# EAGLE board BoostConverter(using ATmega328P) (EAGLE 9.6.0)
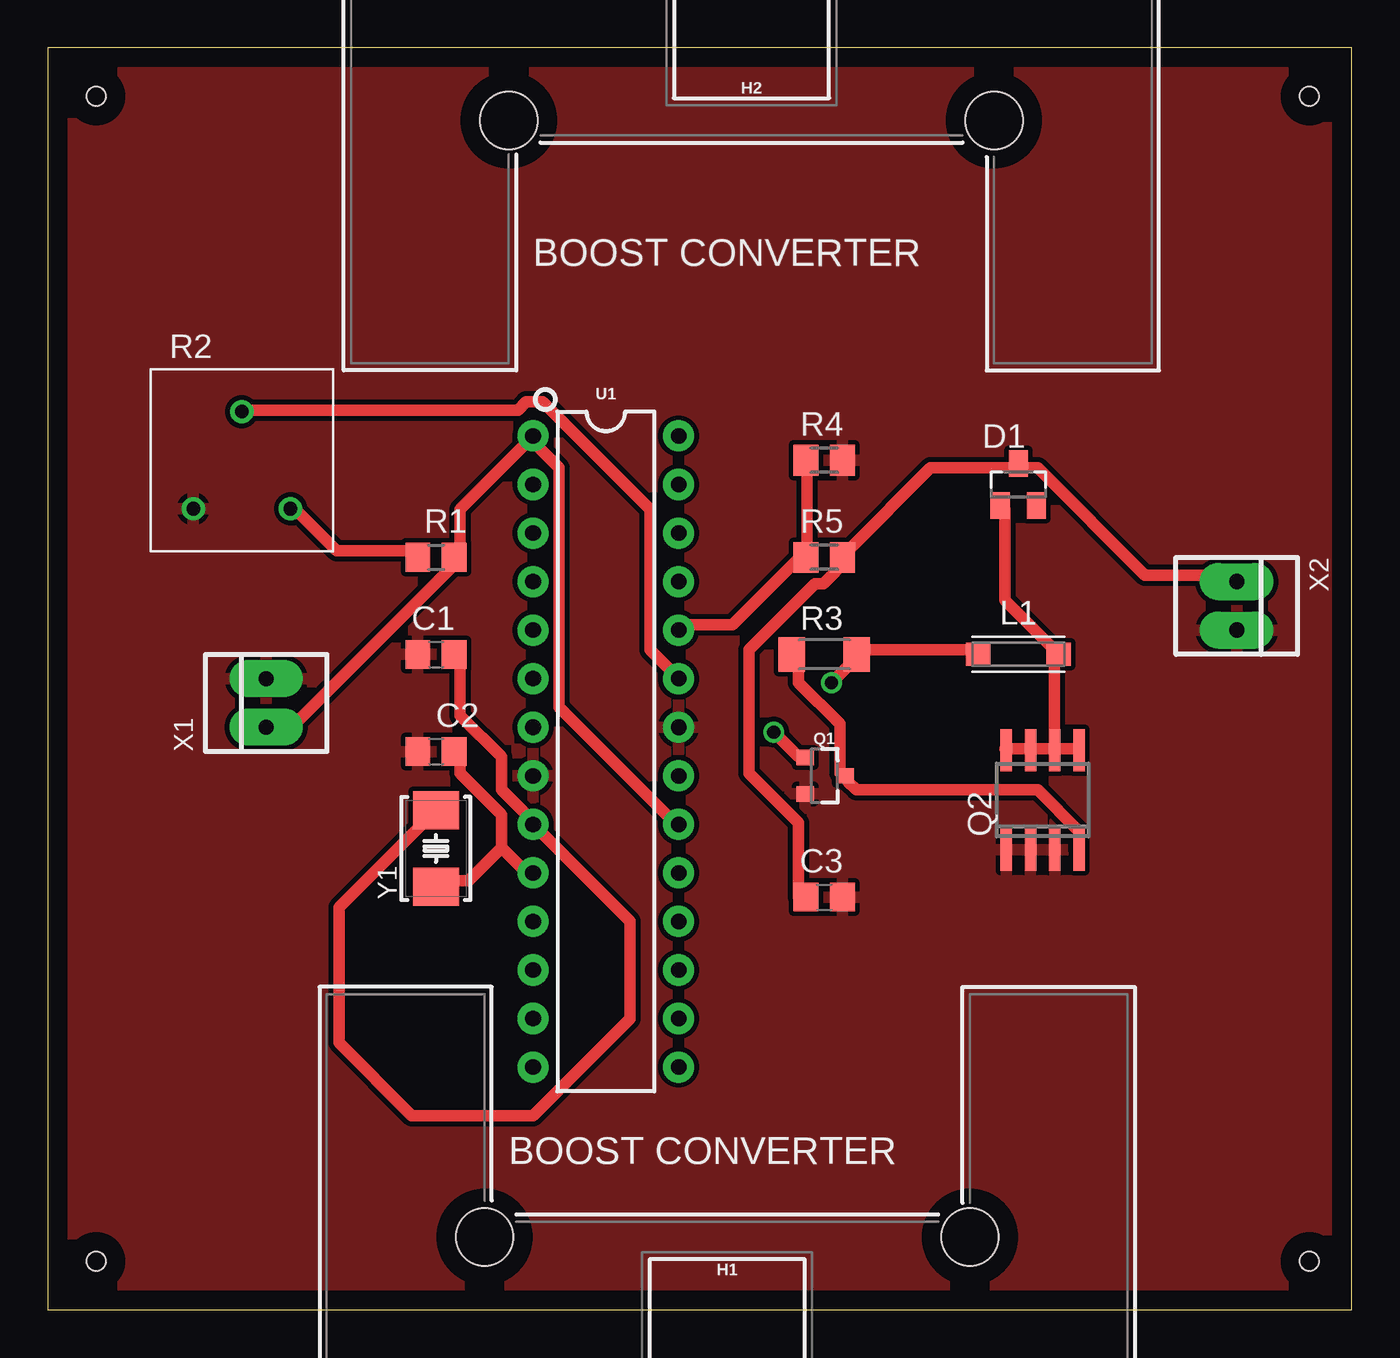
[diagram p0: board, top side]
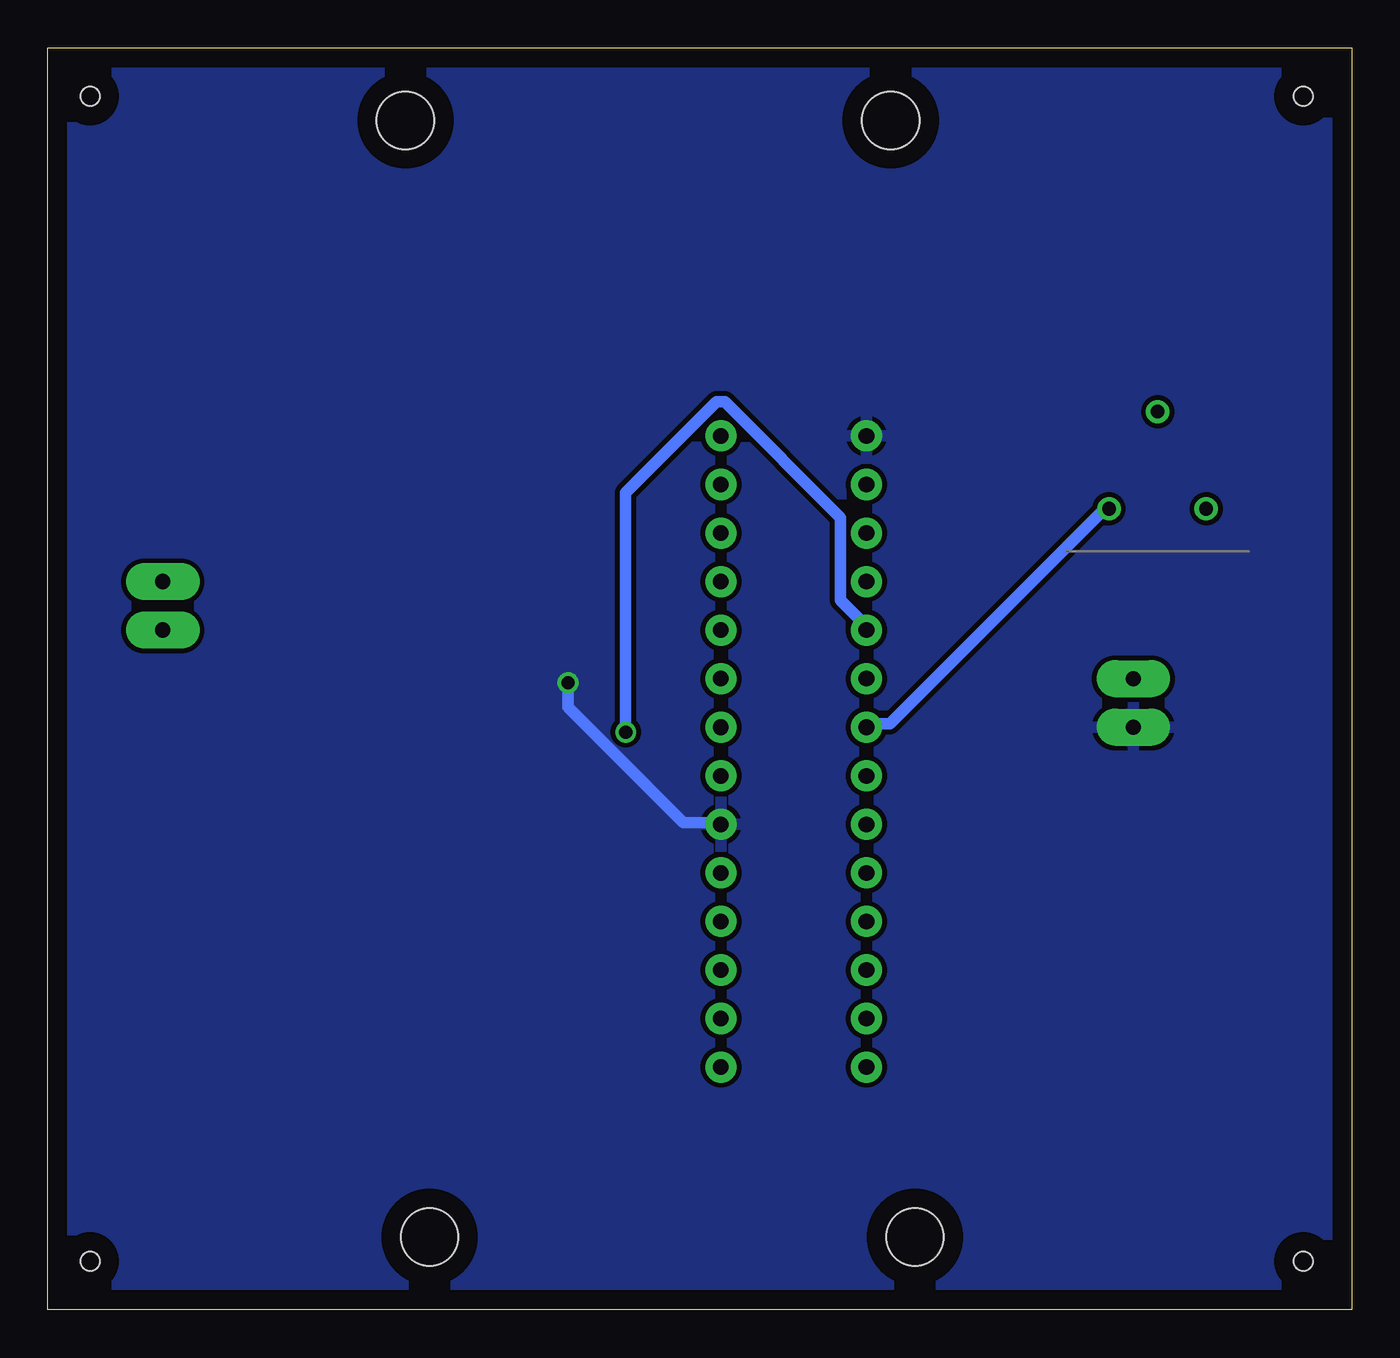
[diagram p1: board, bottom side, seen from below]

Size 68.25 x 66.03 mm. Coordinates in mm from the lower left corner, seen from the top.
Outline: 0,0 68.25,0 68.25,66.03 0,66.03 0,0
Copper layers (1*16): Top 0.035mm / dielectric 1.5mm / Bottom 0.035mm
Design rules "default": minimum track width 6mil, minimum drill 0.35mm, track to track 6mil, track to pad 6mil, pad to pad 6mil, via to via 6mil, smd to smd 6mil, copper to edge 40mil, drill to drill 6mil, minimum pad ring 10mil, minimum via ring 8mil, stop-mask expansion 4mil, vias tented up to drill 0mil, thermal gap 10mil
Net classes: 0 default: width 0.61 mm, drill 0.686 mm, clearance 0.254 mm
Holes 1 mm at 2.54,2.54 2.54,63.5 66.04,63.5 66.04,2.54

## Footprints (pad centres in the part's own frame; a part is rotated, then mirrored left to right if it is on the bottom)
C0805 = smd 1.3 x 1.5: 1 -0.95,0; 2 0.95,0
SOT23 = smd 1 x 1.4: 1 -0.95,-1.1; 2 0.95,-1.1; 3 0,1.1
6400BG_HEATSINK = hole 2.997: -12.7,0; 12.7,0
INDC4509X190 = smd 1.29 x 1.21: 1 -2.11,0; 2 2.11,0
SOT23-3 = smd 0.8 x 0.9: 1 -0.95,-1; 2 0.95,-1; 3 0,1.1
SO-08 = smd 0.6 x 2.2: 1 -1.905,-2.6; 2 -0.635,-2.6; 3 0.635,-2.6; 4 1.905,-2.6; 5 1.905,2.6; 6 0.635,2.6; 7 -0.635,2.6; 8 -1.905,2.6
R0805 = smd 1.3 x 1.5: 1 -0.95,0; 2 0.95,0
3310Y-001-104L-ND = drill 0.71: 1 -2.54,-2.54; 2 0,2.54; 3 2.54,-2.54
M1406 = smd 1.4 x 1.8: 1 -1.7,0; 2 1.7,0
M0805 = smd 1.3 x 1.6: 1 -0.95,0; 2 0.95,0
DIP28 = drill 0.813 pad 1.626: 1 -16.51,-3.81; 2 -13.97,-3.81; 3 -11.43,-3.81; 4 -8.89,-3.81; 5 -6.35,-3.81; 6 -3.81,-3.81; 7 -1.27,-3.81; 8 1.27,-3.81; 9 3.81,-3.81; 10 6.35,-3.81; 11 8.89,-3.81; 12 11.43,-3.81; 13 13.97,-3.81; 14 16.51,-3.81; 15 16.51,3.81; 16 13.97,3.81; 17 11.43,3.81; 18 8.89,3.81; 19 6.35,3.81; 20 3.81,3.81; 21 1.27,3.81; 22 -1.27,3.81; 23 -3.81,3.81; 24 -6.35,3.81; 25 -8.89,3.81; 26 -11.43,3.81; 27 -13.97,3.81; 28 -16.51,3.81
22-23-2021 = drill 0.8 pad 1.93 long: 1 -1.27,0; 2 1.27,0
CRYSTAL_2-SMD-5X3 = smd 2 x 2.4: 1 -2,0; 2 2,0

## Placement (x,y rotation side)
C1  [C0805]  20.32,34.29 0 top
C2  [C0805]  20.32,29.21 0 top
C3  [C0805]  40.64,21.59 0 top
D1  BAS70  [SOT23]  50.8,43.18 0 top
H1  6400BG_HEATSINK  [6400BG_HEATSINK]  35.56,3.81 180 top
H2  6400BG_HEATSINK  [6400BG_HEATSINK]  36.83,62.23 0 top
L1  [INDC4509X190]  50.8,34.29 0 top
Q1  600mA/40V  [SOT23-3]  40.64,27.94 270 top
Q2  [SO-08]  52.07,26.67 0 top
R1  [R0805]  20.32,39.37 0 top
R2  3310Y-001-104L  [3310Y-001-104L-ND]  10.16,44.45 0 top
R3  [M1406]  40.64,34.29 0 top
R4  [M0805]  40.64,44.45 0 top
R5  [M0805]  40.64,39.37 0 top
U1  328P  [DIP28]  29.21,29.21 270 top
X1  22-23-2021  [22-23-2021]  11.43,31.75 90 top
X2  22-23-2021  [22-23-2021]  62.23,36.83 270 top
Y1  CRYSTAL_NX5032GA  [CRYSTAL_2-SMD-5X3]  20.32,24.13 90 top

## Library data of the parts
C1-C3 = rcl; SPICEPREFIX: C
D1 = diode
H1 H2 = SparkFun-Hardware; PROD_ID: COMP-09537; SF_SKU: PRT-09576
L1 = Inductor; CATEGORY: Inductor; SUB-CATEGORY: Fixed
Q1 = SparkFun-DiscreteSemi; PROD_ID: TRANS-08049
Q2 = transistor-power
R1 R3-R5 = rcl; SPICEPREFIX: R
R2 = Potentiometer_Trimmers; CREATED_BY: PCBLayout.com; DIGIKEY_PARTNO: 3310Y-001-104L-ND; MANUFACTURER: Bourns Inc.; MPN: 3310Y-001-104L
U1 = SparkFun-IC-Microcontroller; PROD_ID: IC-09136
X1 X2 = con-molex; MF: MOLEX; MPN: 22-23-2021; OC_FARNELL: 1462926; OC_NEWARK: 25C3832
Y1 = 52101-101-REV-A

## Nets
+5V: L1.1 R1.2 R3.2 U1.1 U1.20 X1.1
GND: C1.1 C2.1 C3.2 Q1.2 Q2.1 Q2.2 Q2.3 R2.1 R4.2 U1.8 U1.22 X1.2 X2.2
N$1: C1.2 U1.9 Y1.2
N$2: C2.2 U1.10 Y1.1
N$3: R4.1 R5.1 U1.24
N$4: Q1.3 Q2.4 R3.1
N$5: R2.2 U1.23
N$6: Q1.1 U1.5
N$7: D1.1 L1.2 Q2.5 Q2.6 Q2.7 Q2.8
N$8: C3.1 D1.3 R5.2 X2.1
N$9: R1.1 R2.3 U1.7

## Tracks (layer width: path | path; a pad name or v marks a point on that pad's centre or on a via)
+5V  (via drill 0.69)
  Top 0.61: L1.1 48.36,34.54 42.75,34.54 R3.2 42.32,34.11 v41.02,32.82 | U1.20 32.82,25.48 26.77,31.52 26.77,44.04 25.48,45.34 U1.1 25.04,45.34 21.59,41.88 21.59,39.73 R1.2 21.59,39.29 12.95,30.66 11.66,30.66 X1.1
  Bottom 0.61: v41.02,32.82 41.02,31.52 34.98,25.48 33.25,25.48 U1.20
  pour Bottom: 0,66.04 0,0 68.58,0 68.58,66.04
GND
  pour Top: 0,66.04 0,0 68.58,0 68.58,66.04
N$1
  Top 0.61: C1.2 21.59,34.11 21.59,31.09 23.75,28.93 23.75,27.2 25.48,25.48 U1.9 30.48,20.32 30.48,15.24 25.4,10.16 19.05,10.16 15.24,13.97 15.24,20.32 15.24,21.05 Y1.2
N$2
  Top 0.61: 23.75,24.18 23.75,25.91 21.59,28.07 21.59,28.93 C2.2 | 23.75,24.18 25.04,22.89 U1.10 | 23.75,24.18 22.02,22.45 20.73,22.45 Y1.1
N$3
  Top 0.61: R4.1 39.73,44.04 39.73,39.73 R5.1 39.29,39.29 35.84,35.84 33.25,35.84 U1.24
N$4
  Top 0.61: R3.1 39.29,34.11 39.29,32.82 41.45,30.66 41.45,28.07 Q1.3 41.88,27.64 42.32,27.2 51.82,27.2 53.98,25.04 Q2.4
N$5
  Top 0.61: R2.2 10.36,47.07 24.61,47.07 25.04,47.5 25.91,47.5 31.52,41.88 31.52,34.54 32.82,33.25 U1.23
N$6  (via drill 0.69)
  Top 0.61: v38,30.23 39.29,28.93 Q1.1
  Bottom 0.61: v38,30.23 38,42.75 33.25,47.5 32.82,47.5 26.77,41.45 26.77,37.13 25.48,35.84 U1.5
N$7
  Top 0.61: 51.38,29.36 50.09,29.36 Q2.8 | 52.68,29.36 52.68,34.11 L1.2 52.68,34.54 50.09,37.13 50.09,41.88 D1.1 | 52.68,29.36 53.98,29.36 Q2.5 | 52.68,29.36 51.38,29.36 | 51.38,29.36 Q2.7 | 52.68,29.36 Q2.6
N$8
  Top 0.61: C3.1 39.29,21.59 39.29,25.48 36.7,28.07 36.7,34.54 40.16,38 40.59,38 41.88,39.29 R5.2 41.88,39.73 46.2,44.04 50.52,44.04 D1.3 50.95,44.04 51.82,44.04 57.43,38.43 62.18,38.43 X2.1
N$9
  Top 0.61: R1.1 19,39.73 15.11,39.73 12.95,41.88 R2.3
  Bottom 0.61: U1.7 25.04,30.66 24.18,30.66 12.95,41.88 R2.3

## Text on the board
tPlace: BOOST CONVERTER | BOOST CONVERTER